# Altium PCB SPI-主板-开关.PcbDoc (part 11 of 11)
Units mm, origin at the board's own origin, x right, y up, seen from the top; angles counter-clockwise.
Board outline 97.69 x 103.45 mm, 2 copper layers (Top Layer, Bottom Layer); 86 components, 63 nets, 260 pads, 250 vias.
Unrouted connection lines stored in the file: 6.
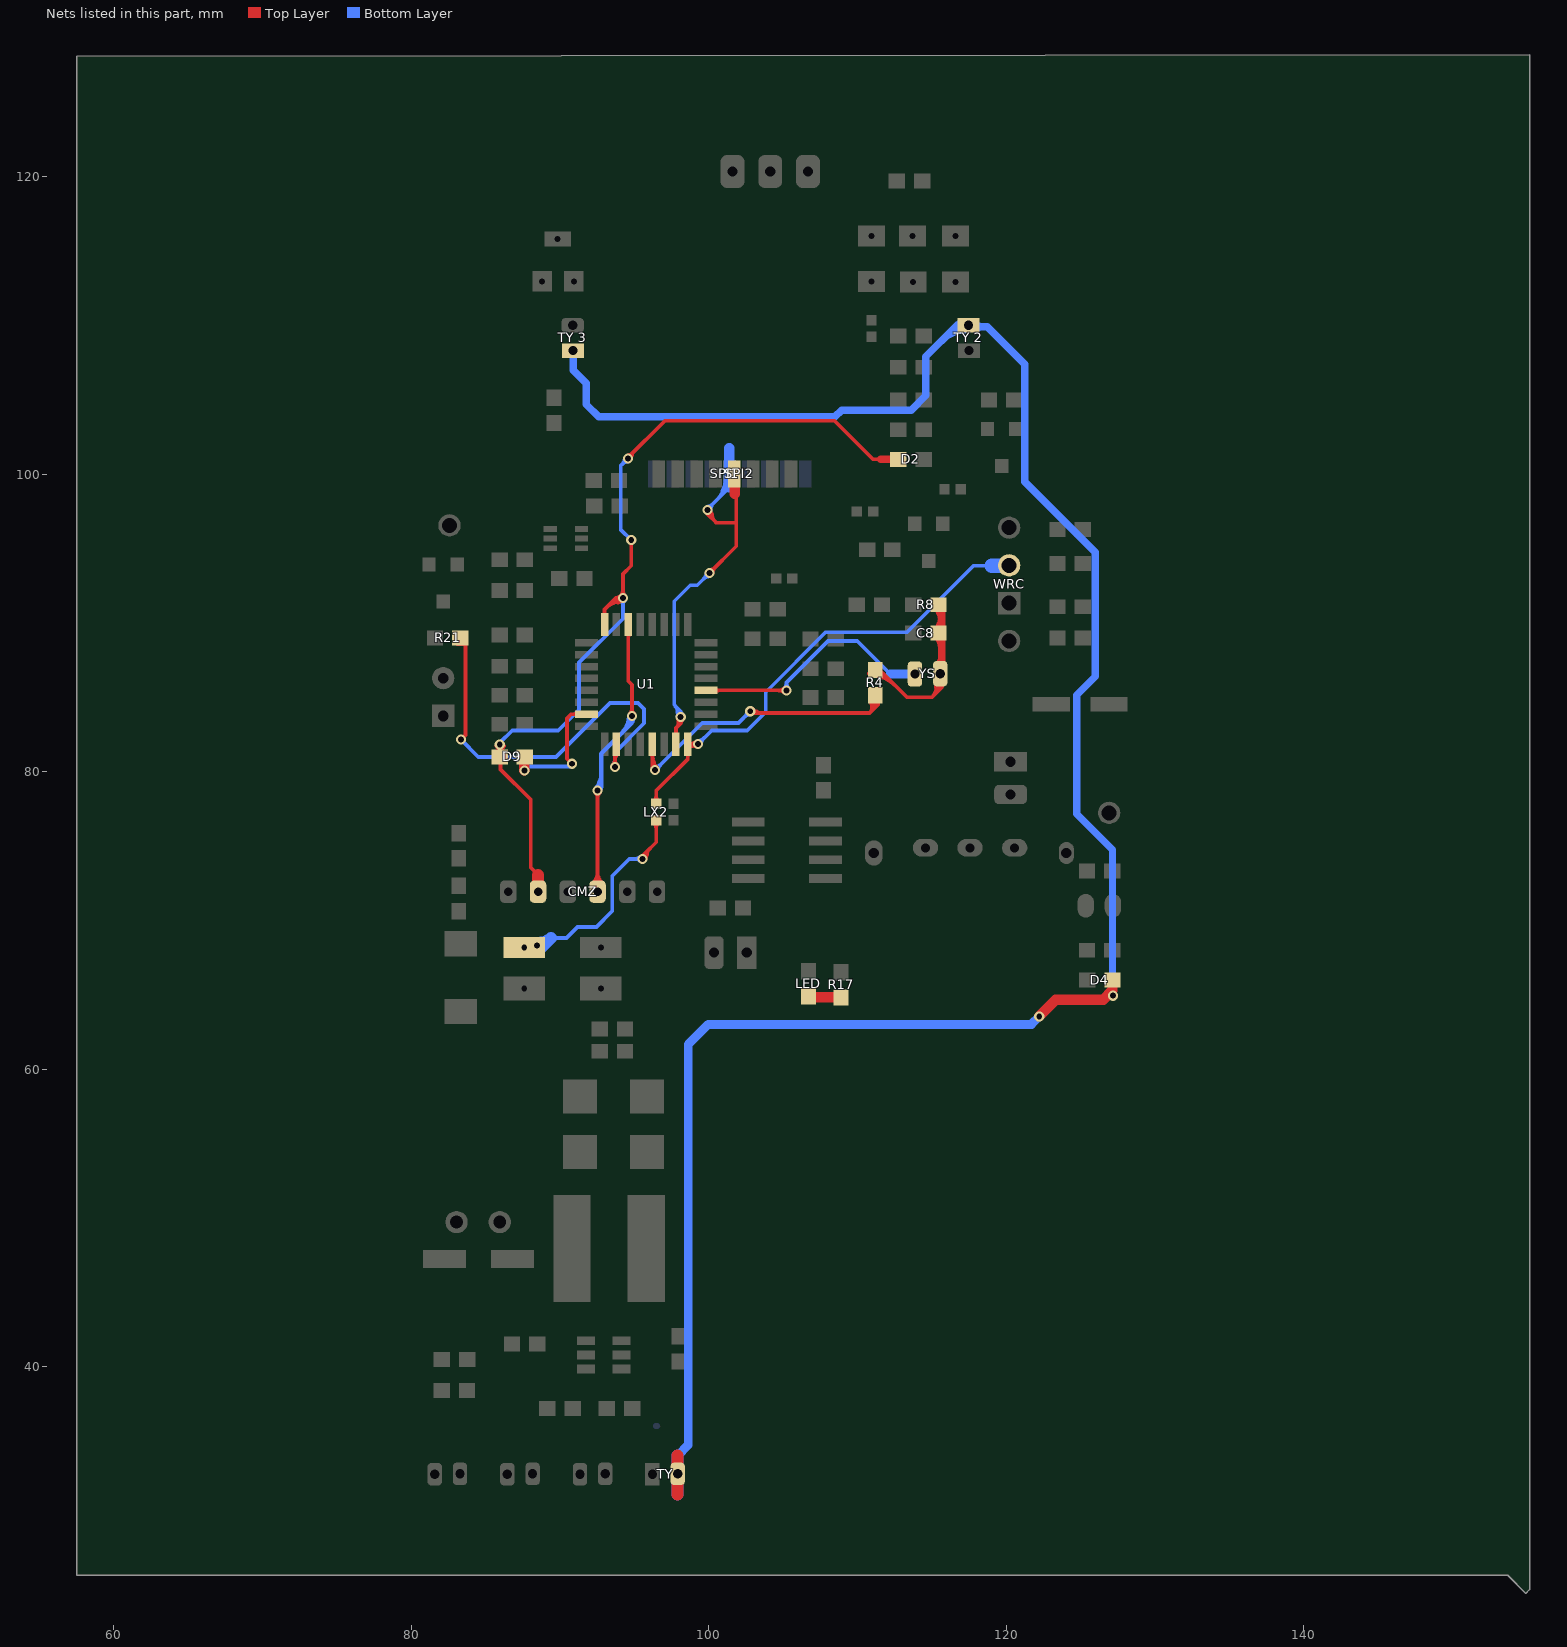
[diagram p11: the nets of this part, all layers, seen from the top]

## Via types
v1: diameter 0.9, hole 0.5, Top Layer to Bottom Layer, 104 vias
v2: diameter 0.68, hole 0.4, Top Layer to Bottom Layer, 100 vias
v3: diameter 1.1, hole 0.6, Top Layer to Bottom Layer, tented both sides, 16 vias
v4: diameter 1, hole 0.8, Top Layer to Bottom Layer, tented both sides, 8 vias
v5: diameter 1, hole 0.6, Top Layer to Bottom Layer, 4 vias
v6: diameter 0.8, hole 0.5, Top Layer to Bottom Layer, 4 vias
v7: diameter 0.7, hole 0.4, Top Layer to Bottom Layer, 4 vias
v8: diameter 0.6, hole 0.4, Top Layer to Bottom Layer, 3 vias
v9: diameter 1.1, hole 0.68, Top Layer to Bottom Layer, 2 vias
v10: diameter 0.8, hole 0.4, Top Layer to Bottom Layer, 2 vias
v11: diameter 1, hole 0.5, Top Layer to Bottom Layer, 1 vias
v12: diameter 0.9, hole 0.6, Top Layer to Bottom Layer, tented bottom, 1 vias
v13: diameter 1.2, hole 0.68, Top Layer to Bottom Layer, 1 vias

## Nets (pads, with @x,y where several pads share a name; then routed paths per layer and width w, separated by ;. In a path a pad name is that pad's centre, name@x,y a point inside that pad or via, vN(x,y) a via of type N, cw(c..) or ccw(c..) an arc to the next point about the centre after c; other vN are vias at no path point) (continued)
SCK: SPI1.4 SPI2.4 U1.31 | length 76.4
  Top Layer w0.254: U1.31@97.8,81.853 97.8,82.939 ; v2(98.12,83.693) 98.12,83.259 ; v2(99.924,97.612) 99.924,97.333 100.508,96.749 101.854,96.749 ; v2@100.025,93.523 100.051,93.497 v2(100.051,93.358) 101.854,95.161 SPI1.4@101.854,100.406 ; 100.101,97.155 v2@100.101,97.434 ; SPI1.4@101.727,100.032 SPI1.4@101.727,100.406 ; U1.31@97.713,82.464 ccw(c97.503,82.674) 97.8,82.674 ; U1.31@97.713,82.464 ccw(c97.503,82.674) 97.8,82.674 ; U1.31@97.713,82.464 ccw(c97.503,82.674) 97.8,82.674 ; 97.8,82.674 ccw(c98.097,82.674) U1.31@97.887,82.464 ; 97.8,82.674 ccw(c98.097,82.674) U1.31@97.887,82.464 ; 97.8,82.674 ccw(c98.097,82.674) U1.31@97.887,82.464 ; 97.8,82.939 ccw(c97.375,83.365) v2@97.925,83.607 ; 97.8,82.939 ccw(c97.375,83.365) v2@97.925,83.607 ; 97.8,82.939 ccw(c97.375,83.365) v2@97.925,83.607 ; 97.8,82.939 98.12,83.259 ; v2@97.99,83.524 cw(c97.785,83.259) 98.12,83.259 ; v2@97.99,83.524 cw(c97.785,83.259) 98.12,83.259 ; v2@97.99,83.524 cw(c97.785,83.259) 98.12,83.259 ; 98.063,83.202 ccw(c97.739,83.525) v2@98.158,83.71 ; 98.063,83.202 ccw(c97.739,83.525) v2@98.158,83.71 ; 98.063,83.202 ccw(c97.739,83.525) v2@98.158,83.71 ; 98.12,83.259 cw(c98.455,83.259) v2@98.25,83.524 ; 98.12,83.259 cw(c98.455,83.259) v2@98.25,83.524 ; 98.12,83.259 cw(c98.455,83.259) v2@98.25,83.524 ; v2@99.876,97.405 cw(c99.811,97.122) 100.101,97.122 ; v2@99.876,97.405 cw(c99.811,97.122) 100.101,97.122 ; v2@99.876,97.405 cw(c99.811,97.122) 100.101,97.122 ; v2@99.883,97.612 ccw(c100.458,97.612) 100.051,97.205 ; v2@99.883,97.612 ccw(c100.458,97.612) 100.051,97.205 ; v2@99.883,97.612 ccw(c100.458,97.612) 100.051,97.205 ; v2@99.944,97.648 cw(c99.642,97.125) 100.225,97.281 ; v2@99.944,97.648 cw(c99.642,97.125) 100.225,97.281 ; v2@99.944,97.648 cw(c99.642,97.125) 100.225,97.281 ; v2@100.051,93.571 ccw(c100.051,94.085) 100.414,93.721 ; v2@100.051,93.571 ccw(c100.051,94.085) 100.414,93.721 ; v2@100.051,93.571 ccw(c100.051,94.085) 100.414,93.721 ; v2@100.137,97.612 ccw(c101.325,97.612) 100.485,96.772 ; v2@100.137,97.612 ccw(c101.325,97.612) 100.485,96.772 ; v2@100.137,97.612 ccw(c101.325,97.612) 100.485,96.772 ; v2@100.264,93.358 cw(c100.778,93.358) 100.414,93.721 ; v2@100.264,93.358 cw(c100.778,93.358) 100.414,93.721 ; v2@100.264,93.358 cw(c100.778,93.358) 100.414,93.721 ; SPI1.4@101.516,99.346 cw(c100.701,98.531) 101.854,98.531 ; SPI1.4@101.516,99.346 cw(c100.701,98.531) 101.854,98.531 ; SPI1.4@101.516,99.346 cw(c100.701,98.531) 101.854,98.531 ; SPI1.4@101.696,99.526 cw(c101.314,99.144) SPI1.4@101.854,99.144 ; SPI1.4@101.696,99.526 cw(c101.314,99.144) SPI1.4@101.854,99.144 ; SPI1.4@101.696,99.526 cw(c101.314,99.144) SPI1.4@101.854,99.144 ; SPI1.4@101.854,99.144 cw(c102.14,99.144) SPI1.4@101.938,99.346 ; SPI1.4@101.854,99.144 cw(c102.14,99.144) SPI1.4@101.938,99.346 ; SPI1.4@101.854,99.144 cw(c102.14,99.144) SPI1.4@101.938,99.346
  Top Layer w0.7: SPI1.4@101.727,100.406 SPI1.4@101.759,99.955 ; 101.752,98.679 SPI1.4@101.752,100.21
  Bottom Layer w0.254: v2(98.12,83.693) 98.12,84.074 ; v2@99.898,97.638 SPI2.4@101.397,99.136 ; v2@100.051,93.497 v2(100.051,93.358) 99.231,92.539 98.762,92.539 97.688,91.465 97.688,84.506 ; SPI2.4@101.124,99.473 cw(c100.78,99.373) 101.033,99.12 cw(c101.371,98.783) SPI2.4@101.395,99.259 ; 97.688,84.506 cw(c97.101,83.918) v2@97.912,83.739 ; 97.688,84.506 cw(c97.101,83.918) v2@97.912,83.739 ; 97.688,84.506 cw(c97.101,83.918) v2@97.912,83.739 ; 97.688,84.506 98.12,84.074 ; 97.897,84.081 ccw(c98.5,84.108) v2@98.093,83.663 ; 97.897,84.081 ccw(c98.5,84.108) v2@98.093,83.663 ; 97.897,84.081 ccw(c98.5,84.108) v2@98.093,83.663 ; v2@98.009,83.874 ccw(c97.886,84.074) 98.12,84.074 ; v2@98.009,83.874 ccw(c97.886,84.074) 98.12,84.074 ; v2@98.009,83.874 ccw(c97.886,84.074) 98.12,84.074 ; 98.016,84.178 cw(c97.638,83.8) v2@98.16,83.684 ; 98.016,84.178 cw(c97.638,83.8) v2@98.16,83.684 ; 98.016,84.178 cw(c97.638,83.8) v2@98.16,83.684 ; 98.12,84.074 ccw(c98.354,84.074) v2@98.232,83.874 ; 98.12,84.074 ccw(c98.354,84.074) v2@98.232,83.874 ; 98.12,84.074 ccw(c98.354,84.074) v2@98.232,83.874 ; 99.687,92.994 ccw(c99.323,93.358) v2@99.838,93.358 ; 99.687,92.994 cw(c100.051,92.63) v2@100.051,93.145 ; 99.687,92.994 ccw(c99.323,93.358) v2@99.838,93.358 ; 99.687,92.994 cw(c100.051,92.63) v2@100.051,93.145 ; 99.687,92.994 ccw(c99.323,93.358) v2@99.838,93.358 ; 99.687,92.994 cw(c100.051,92.63) v2@100.051,93.145 ; v2@99.924,97.825 ccw(c99.924,98.217) 100.2,97.94 ; v2@99.924,97.825 ccw(c99.924,98.217) 100.2,97.94 ; v2@99.924,97.825 ccw(c99.924,98.217) 100.2,97.94 ; v2@100.137,97.612 cw(c100.773,97.612) 100.323,98.063 ; v2@100.137,97.612 cw(c100.773,97.612) 100.323,98.063 ; v2@100.137,97.612 cw(c100.773,97.612) 100.323,98.063 ; 100.613,98.353 ccw(c99.409,99.557) SPI2.4@101.112,99.557 ; 100.613,98.353 ccw(c99.409,99.557) SPI2.4@101.112,99.557 ; 100.613,98.353 ccw(c99.409,99.557) SPI2.4@101.112,99.557 ; 100.925,98.857 cw(c101.976,98.576) SPI2.4@101.432,99.519 ; 100.925,98.857 cw(c101.976,98.576) SPI2.4@101.432,99.519 ; 100.925,98.857 cw(c101.976,98.576) SPI2.4@101.432,99.519 ; 101.047,98.786 ccw(c100.276,99.557) SPI2.4@101.366,99.557 ; 101.047,98.786 ccw(c100.276,99.557) SPI2.4@101.366,99.557 ; 101.047,98.786 ccw(c100.276,99.557) SPI2.4@101.366,99.557 ; SPI2.4@101.152,99.408 cw(c100.655,99.121) 101.209,98.972 ; SPI2.4@101.152,99.408 cw(c100.655,99.121) 101.209,98.972 ; SPI2.4@101.152,99.408 cw(c100.655,99.121) 101.209,98.972 ; 101.201,98.941 cw(c101.675,98.814) SPI2.4@101.51,99.276 ; 101.201,98.941 cw(c101.675,98.814) SPI2.4@101.51,99.276 ; 101.201,98.941 cw(c101.675,98.814) SPI2.4@101.51,99.276
  Bottom Layer w0.7: SPI2.4@101.397,99.136 101.397,101.752
SWIM: LX2.1 LX2.2 pad.0@87.6,68.182 U1.32 WRC.3 | length 80.9
  Top Layer w0.254: v2(95.555,74.143) 95.555,74.346 96.469,75.26 LX2.1@96.469,76.742 ; LX2.2@96.469,77.842 96.469,78.74 98.6,80.871 U1.32@98.6,81.852 ; v2(99.289,81.864) 98.857,81.864 ; v2@95.573,74.106 ccw(c95.335,74.581) 95.848,74.443 ; v2@95.573,74.106 ccw(c95.335,74.581) 95.848,74.443 ; v2@95.573,74.106 ccw(c95.335,74.581) 95.848,74.443 ; v2@95.768,74.143 cw(c96.773,74.143) 96.062,74.853 ; v2@95.768,74.143 cw(c96.773,74.143) 96.062,74.853 ; v2@95.768,74.143 cw(c96.773,74.143) 96.062,74.853 ; LX2.1@96.312,76.584 cw(c95.931,76.204) 96.469,76.204 ; LX2.1@96.312,76.584 cw(c95.931,76.204) 96.469,76.204 ; LX2.1@96.312,76.584 cw(c95.931,76.204) 96.469,76.204 ; LX2.2@96.312,78 ccw(c95.931,78.38) 96.469,78.38 ; LX2.2@96.312,78 ccw(c95.931,78.38) 96.469,78.38 ; LX2.2@96.312,78 ccw(c95.931,78.38) 96.469,78.38 ; 96.469,76.204 cw(c97.008,76.204) LX2.1@96.627,76.584 ; 96.469,76.204 cw(c97.008,76.204) LX2.1@96.627,76.584 ; 96.469,76.204 cw(c97.008,76.204) LX2.1@96.627,76.584 ; 96.469,78.38 ccw(c97.008,78.38) LX2.2@96.627,78 ; 96.469,78.38 ccw(c97.008,78.38) LX2.2@96.627,78 ; 96.469,78.38 ccw(c97.008,78.38) LX2.2@96.627,78 ; U1.32@98.513,81.24 cw(c98.303,81.031) 98.6,81.031 ; U1.32@98.513,81.24 cw(c98.303,81.031) 98.6,81.031 ; U1.32@98.513,81.24 cw(c98.303,81.031) 98.6,81.031 ; 98.6,81.031 cw(c98.897,81.031) U1.32@98.687,81.24 ; 98.6,81.031 cw(c98.897,81.031) U1.32@98.687,81.24 ; 98.6,81.031 cw(c98.897,81.031) U1.32@98.687,81.24 ; U1.32@98.6,81.607 cw(c98.937,81.27) v2@99.18,81.681 ; U1.32@98.6,81.607 cw(c98.937,81.27) v2@99.18,81.681 ; U1.32@98.6,81.607 cw(c98.937,81.27) v2@99.18,81.681 ; U1.32@98.6,81.607 98.857,81.864 ; U1.32@98.687,81.765 cw(c98.925,81.527) 98.925,81.864 ; U1.32@98.687,81.765 cw(c98.925,81.527) 98.925,81.864 ; U1.32@98.687,81.765 cw(c98.925,81.527) 98.925,81.864 ; U1.32@98.687,81.939 ccw(c98.869,82.121) 98.869,81.864 ; U1.32@98.687,81.939 ccw(c98.869,82.121) 98.869,81.864 ; U1.32@98.687,81.939 ccw(c98.869,82.121) 98.869,81.864 ; U1.32@98.688,81.939 ccw(c98.838,82.087) 98.944,81.904 ; U1.32@98.688,81.939 ccw(c98.838,82.087) 98.944,81.904 ; U1.32@98.688,81.939 ccw(c98.838,82.087) 98.944,81.904 ; U1.32@98.69,81.937 ccw(c98.857,82.093) 98.857,81.864 ; U1.32@98.69,81.937 ccw(c98.857,82.093) 98.857,81.864 ; U1.32@98.69,81.937 ccw(c98.857,82.093) 98.857,81.864 ; U1.32@98.701,81.783 cw(c98.857,81.675) 98.857,81.864 ; U1.32@98.701,81.783 cw(c98.857,81.675) 98.857,81.864 ; U1.32@98.701,81.783 cw(c98.857,81.675) 98.857,81.864 ; U1.32@98.832,81.839 cw(c99.11,81.561) v2@99.309,81.899 ; U1.32@98.832,81.839 cw(c99.11,81.561) v2@99.309,81.899 ; U1.32@98.832,81.839 cw(c99.11,81.561) v2@99.309,81.899 ; 98.857,81.864 ccw(c98.857,82.195) v2@99.12,81.994 ; 98.857,81.864 cw(c98.857,81.533) v2@99.12,81.735 ; 98.857,81.864 ccw(c98.857,82.195) v2@99.12,81.994 ; 98.857,81.864 cw(c98.857,81.533) v2@99.12,81.735 ; 98.857,81.864 ccw(c98.857,82.195) v2@99.12,81.994 ; 98.857,81.864 cw(c98.857,81.533) v2@99.12,81.735
  Bottom Layer w0.254: 89.408,68.834 90.449,68.834 91.186,69.571 92.456,69.571 93.523,70.637 93.523,73 94.666,74.143 v2@95.549,74.143 ; v2(99.289,81.864) 100.203,82.779 102.591,82.779 103.835,84.023 103.835,85.355 107.863,89.383 113.335,89.383 117.805,93.853 119.05,93.853 ; 95.041,74.143 ccw(c95.041,74.657) 95.404,74.293 cw(c95.041,74.657) 95.041,74.143 ; 95.041,74.143 cw(c95.041,73.628) 95.404,73.992 ccw(c95.041,73.628) 95.041,74.143 ; 99.652,82.228 ccw(c100.016,81.864) 99.502,81.864 cw(c100.016,81.864) 99.652,82.228 ; 99.652,82.228 cw(c99.289,82.591) 99.289,82.077 ccw(c99.289,82.591) 99.652,82.228
  Bottom Layer w0.8: pad.0@87.6,68.182 pad.0@87.968,68.182 ; pad.0@87.968,68.182 cw(c88.341,67.81) v10(88.443,68.326) ; pad.0@87.968,68.182 cw(c88.341,67.81) v10(88.443,68.326) ; pad.0@87.968,68.182 cw(c88.341,67.81) v10(88.443,68.326) ; pad.0@87.968,68.182 pad.0@87.986,68.199 ; pad.0@87.986,68.199 cw(c88.327,67.858) v10(88.443,68.326) ; pad.0@87.986,68.199 cw(c88.327,67.858) v10(88.443,68.326) ; pad.0@87.986,68.199 cw(c88.327,67.858) v10(88.443,68.326) ; pad.0@87.986,68.199 88.773,68.199 89.408,68.834 ; pad.0@88.342,68.479 ccw(c88.52,69.722) 89.408,68.834 ; pad.0@88.342,68.479 ccw(c88.52,69.722) 89.408,68.834 ; pad.0@88.342,68.479 ccw(c88.52,69.722) 89.408,68.834 ; v10(88.443,68.326) ccw(c88.443,69.43) 89.223,68.649 ; v10(88.443,68.326) cw(c88.882,67.981) pad.0@88.816,68.536 ; v10(88.443,68.326) ccw(c88.443,69.43) 89.223,68.649 ; v10(88.443,68.326) cw(c88.882,67.981) pad.0@88.816,68.536 ; v10(88.443,68.326) cw(c88.882,67.981) pad.0@88.816,68.536 ; v10(88.443,68.326) ccw(c88.443,69.43) 89.223,68.649 ; v10(88.443,68.326) cw(c88.882,67.981) pad.0@88.816,68.536 ; v10(88.443,68.326) cw(c88.882,67.981) pad.0@88.816,68.536 ; v10(88.443,68.326) cw(c88.882,67.981) pad.0@88.816,68.536
  Bottom Layer w1: 119.05,93.853 WRC.3@120.2,93.853
T-LED: LED.2 R17.1 | length 2.3
  Top Layer w0.7: LED.2@106.6,64.831 107.544,64.831 R17.1@108.9,64.831
TEMP: R21.1 U1.26 | length 35.3
  Top Layer w0.254: R21.1@83.095,88.595 83.642,88.595 83.642,82.474 v2(83.337,82.169) ; v2(93.701,80.315) U1.26@93.701,82.223 ; v2@93.55,80.465 ccw(c93.186,80.829) 93.701,80.829 ; v2@93.55,80.465 ccw(c93.186,80.829) 93.701,80.829 ; v2@93.55,80.465 ccw(c93.186,80.829) 93.701,80.829 ; 93.701,80.79 cw(c94.337,80.79) U1.26@93.887,81.241 ; 93.701,80.79 cw(c94.337,80.79) U1.26@93.887,81.241 ; 93.701,80.79 cw(c94.337,80.79) U1.26@93.887,81.241 ; 93.701,80.829 ccw(c94.215,80.829) v2@93.851,80.465 ; 93.701,80.829 ccw(c94.215,80.829) v2@93.851,80.465 ; 93.701,80.829 ccw(c94.215,80.829) v2@93.851,80.465 ; U1.26@93.72,81.235 cw(c93.605,81.102) 93.757,81.015 ; U1.26@93.72,81.235 cw(c93.605,81.102) 93.757,81.015 ; U1.26@93.72,81.235 cw(c93.605,81.102) 93.757,81.015
  Bottom Layer w0.254: v2(83.337,82.169) 84.506,81.001 89.738,81.001 93.37,84.633 95.25,84.633 95.656,84.226 95.656,83.261 93.701,81.305 v2(93.701,80.315) ; v2@93.55,80.465 ccw(c93.186,80.829) 93.701,80.829 ; v2@93.55,80.465 ccw(c93.186,80.829) 93.701,80.829 ; v2@93.55,80.465 ccw(c93.186,80.829) 93.701,80.829 ; 93.701,80.829 ccw(c94.215,80.829) v2@93.851,80.465 ; 93.701,80.829 ccw(c94.215,80.829) v2@93.851,80.465 ; 93.701,80.829 ccw(c94.215,80.829) v2@93.851,80.465
TY: "TY 2.1" "TY 3.1" D4.2 TY.1 | length 161.8
  Top Layer w0.7: v2(122.225,63.551) 123.342,64.668 126.517,64.668 127.15,65.301 D4.2@127.15,66
  Top Layer w0.8: 97.917,31.394 97.917,34.026
  Bottom Layer w0.5: 90.881,108.419 90.881,107.01 91.77,106.121 91.77,104.699 92.608,103.861 108.483,103.861 108.941,104.318 113.619,104.318 114.605,105.304 114.605,107.925 116.599,109.919 ; 116.158,109.422 ccw(c115.818,110.691) 116.956,110.034 ; v2(127.178,64.948) 127.152,64.973 127.152,74.752 124.739,77.165 124.739,85.166 125.984,86.411 125.984,94.767 121.26,99.492 121.26,107.391 118.732,109.919 117.475,109.919 116.599,109.919 ; 90.719,108.257 cw(c90.326,107.864) 90.881,107.864 ; 90.719,108.257 cw(c90.326,107.864) 90.881,107.864 ; 90.719,108.257 cw(c90.326,107.864) 90.881,107.864 ; 90.881,107.864 cw(c91.436,107.864) 91.044,108.257 ; 90.881,107.864 cw(c91.436,107.864) 91.044,108.257 ; 90.881,107.864 cw(c91.436,107.864) 91.044,108.257 ; 116.6,109.919 ccw(c116.6,110.474) 116.992,110.082 ; 116.6,109.919 cw(c116.6,109.364) 116.992,109.757 ; 116.6,109.919 ccw(c116.6,110.474) 116.992,110.082 ; 116.6,109.919 cw(c116.6,109.364) 116.992,109.757 ; 116.6,109.919 ccw(c116.6,110.474) 116.992,110.082 ; 116.6,109.919 cw(c116.6,109.364) 116.992,109.757 ; 117.958,109.757 cw(c118.35,109.364) 118.35,109.919 ; 117.958,109.757 cw(c118.35,109.364) 118.35,109.919 ; 117.958,109.757 cw(c118.35,109.364) 118.35,109.919 ; 117.958,110.082 ccw(c118.35,110.474) 118.35,109.919 ; 117.958,110.082 ccw(c118.35,110.474) 118.35,109.919 ; 117.958,110.082 ccw(c118.35,110.474) 118.35,109.919 ; 115.814,109.134 cw(c117.155,107.793) 117.155,109.689 ccw(c117.155,107.793) 115.814,109.134 ; 116.667,109.987 cw(c117.155,109.5) 117.155,110.189 ccw(c117.155,109.5) 116.667,109.987
  Bottom Layer w0.6: 97.916,34.032 98.628,34.744 98.628,61.671 99.974,63.017 121.691,63.017 v2(122.225,63.551)
  Bottom Layer w0.8: 97.917,31.42 97.917,34.052
Y30: CMZ.6 D2.2 D9.1 U1.16 | length 90.8
  Top Layer w0.254: D9.1@85.952,81.379 ccw(c85.061,81.069) v2@85.728,81.736 ; D9.1@85.976,81.298 ccw(c85.061,81.069) v2@85.728,81.736 ; D9.1@85.978,81.291 ccw(c85.061,81.069) v2@85.728,81.736 ; v2@86.004,82 86.004,80.162 88.036,78.13 88.036,73.558 88.53,73.065 ; U1.16@93,89.902 93,90.917 93.777,91.694 ; 93.604,91.355 cw(c93.998,90.962) v2@94.169,91.491 ; v2@94.539,101.092 97.053,103.607 108.458,103.607 111.049,101.016 111.531,101.016 ; v2(94.793,95.58) 94.793,93.853 94.234,93.294 v2(94.234,91.694) 93.777,91.694 ; D9.1@86.022,81.302 cw(c86.862,81.13) v2@86.256,81.736 ; D9.1@86.022,81.302 cw(c86.862,81.13) v2@86.256,81.736 ; D9.1@86.022,81.302 cw(c86.862,81.13) v2@86.256,81.736 ; U1.16@92.913,90.514 ccw(c92.703,90.724) 93,90.724 ; U1.16@92.913,90.514 ccw(c92.703,90.724) 93,90.724 ; U1.16@92.913,90.514 ccw(c92.703,90.724) 93,90.724 ; 93,90.724 ccw(c93.297,90.724) U1.16@93.087,90.514 ; 93,90.724 ccw(c93.297,90.724) U1.16@93.087,90.514 ; 93,90.724 ccw(c93.297,90.724) U1.16@93.087,90.514 ; 93.09,91.007 cw(c94.234,89.863) v2@94.234,91.481 ; 93.09,91.007 cw(c94.234,89.863) v2@94.234,91.481 ; 93.09,91.007 cw(c94.234,89.863) v2@94.234,91.481 ; 93.311,91.234 ccw(c92.996,92.409) v2@94.05,91.801 ; 93.311,91.234 ccw(c92.996,92.409) v2@94.05,91.801 ; 93.311,91.234 ccw(c92.996,92.409) v2@94.05,91.801 ; 93.524,91.441 cw(c94.234,90.73) v2@94.234,91.735 ; 93.524,91.441 cw(c94.234,90.73) v2@94.234,91.735 ; 93.524,91.441 cw(c94.234,90.73) v2@94.234,91.735 ; 93.777,91.694 ccw(c93.777,92.078) v2@94.071,91.831 ; 93.777,91.694 cw(c93.777,91.31) v2@94.071,91.557 ; 93.777,91.694 ccw(c93.777,92.078) v2@94.071,91.831 ; 93.777,91.694 cw(c93.777,91.31) v2@94.071,91.557 ; 93.777,91.694 ccw(c93.777,92.078) v2@94.071,91.831 ; 93.777,91.694 cw(c93.777,91.31) v2@94.071,91.557 ; 93.798,91.618 cw(c93.875,91.33) v2@94.084,91.542 ; 93.798,91.618 cw(c93.875,91.33) v2@94.084,91.542 ; 93.798,91.618 cw(c93.875,91.33) v2@94.084,91.542 ; 93.819,91.624 ccw(c93.721,91.99) v2@94.05,91.8 ; 93.819,91.624 ccw(c93.721,91.99) v2@94.05,91.8 ; 93.819,91.624 ccw(c93.721,91.99) v2@94.05,91.8 ; 93.903,91.392 ccw(c93.747,91.975) v2@94.27,91.674 ; 93.903,91.392 ccw(c93.747,91.975) v2@94.27,91.674 ; 93.903,91.392 ccw(c93.747,91.975) v2@94.27,91.674 ; v2@94.083,91.845 ccw(c93.72,92.208) 94.234,92.208 ; v2@94.083,91.845 ccw(c93.72,92.208) 94.234,92.208 ; v2@94.083,91.845 ccw(c93.72,92.208) 94.234,92.208 ; 94.234,92.208 ccw(c94.748,92.208) v2@94.385,91.845 ; 94.234,92.208 ccw(c94.748,92.208) v2@94.385,91.845 ; 94.234,92.208 ccw(c94.748,92.208) v2@94.385,91.845 ; v2@94.564,101.28 ccw(c94.564,101.671) 94.841,101.394 ; v2@94.564,101.28 ccw(c94.564,101.671) 94.841,101.394 ; v2@94.564,101.28 ccw(c94.564,101.671) 94.841,101.394 ; v2@94.576,101.027 ccw(c94.47,101.394) 94.838,101.295 ; v2@94.576,101.027 ccw(c94.47,101.394) 94.838,101.295 ; v2@94.576,101.027 ccw(c94.47,101.394) 94.838,101.295 ; v2@94.777,101.067 cw(c95.414,101.067) 94.964,101.517 ; v2@94.777,101.067 cw(c95.414,101.067) 94.964,101.517 ; v2@94.777,101.067 cw(c95.414,101.067) 94.964,101.517
  Top Layer w0.5: 111.582,101.016 D2.2@112.979,101.016 ; 112.058,101.016 cw(c112.058,100.358) D2.2@112.523,100.823 ; 112.058,101.016 cw(c112.058,100.358) D2.2@112.523,100.823 ; 112.058,101.016 cw(c112.058,100.358) D2.2@112.523,100.823 ; 112.135,101.016 ccw(c112.135,101.565) D2.2@112.523,101.177 ; 112.135,101.016 ccw(c112.135,101.565) D2.2@112.523,101.177 ; 112.135,101.016 ccw(c112.135,101.565) D2.2@112.523,101.177
  Top Layer w0.8: CMZ.6@88.53,71.944 88.53,73.065
  Bottom Layer w0.254: v2@85.979,81.966 86.792,82.779 89.891,82.779 91.288,84.176 91.288,87.351 94.234,90.297 v2@94.234,91.897 ; v2(94.564,101.067) 94.082,100.584 94.082,96.291 v2(94.793,95.58) ; 94.201,100.703 ccw(c93.837,101.067) 94.351,101.067 cw(c93.837,101.067) 94.201,100.703 ; 94.201,100.703 cw(c94.564,100.339) 94.564,100.854 ccw(c94.564,100.339) 94.201,100.703 ; 94.234,91.18 ccw(c93.72,91.18) 94.083,91.543 cw(c93.72,91.18) 94.234,91.18 ; 94.234,91.18 cw(c94.748,91.18) 94.385,91.543 ccw(c94.748,91.18) 94.234,91.18
  other v2: 85.954,81.839
Y30-D: D9.2 U1.23 | length 10.4
  Top Layer w0.254: v2(90.805,80.543) 90.475,80.874 90.475,83.591 90.761,83.878 U1.23@91.775,83.878 ; 90.953,83.878 ccw(c90.953,84.174) U1.23@91.163,83.964 ; 90.953,83.878 cw(c90.953,83.581) U1.23@91.163,83.791 ; 90.953,83.878 ccw(c90.953,84.174) U1.23@91.163,83.964 ; 90.953,83.878 cw(c90.953,83.581) U1.23@91.163,83.791 ; 90.953,83.878 ccw(c90.953,84.174) U1.23@91.163,83.964 ; 90.953,83.878 cw(c90.953,83.581) U1.23@91.163,83.791
  Top Layer w0.7: v2(87.605,80.086) D9.2@87.605,81.111
  Bottom Layer w0.254: v2(87.605,80.086) 87.884,80.366 90.678,80.366 v2@90.83,80.518
Y>: CMZ.4 U1.14 | length 47.8
  Top Layer w0.254: CMZ.4@92.53,71.944 v2(92.53,78.74) ; U1.14@94.6,89.902 94.6,86.096 94.844,85.852 v2@94.844,83.769 ; CMZ.4@92.196,72.478 ccw(c91.388,73.286) 92.53,73.286 ; CMZ.4@92.196,72.478 ccw(c91.388,73.286) 92.53,73.286 ; CMZ.4@92.196,72.478 ccw(c91.388,73.286) 92.53,73.286 ; v2@92.379,78.589 cw(c92.016,78.226) 92.53,78.226 ; v2@92.379,78.589 cw(c92.016,78.226) 92.53,78.226 ; v2@92.379,78.589 cw(c92.016,78.226) 92.53,78.226 ; 92.53,73.286 ccw(c93.672,73.286) CMZ.4@92.864,72.478 ; 92.53,73.286 ccw(c93.672,73.286) CMZ.4@92.864,72.478 ; 92.53,73.286 ccw(c93.672,73.286) CMZ.4@92.864,72.478 ; 92.53,78.226 cw(c93.044,78.226) v2@92.681,78.589 ; 92.53,78.226 cw(c93.044,78.226) v2@92.681,78.589 ; 92.53,78.226 cw(c93.044,78.226) v2@92.681,78.589 ; U1.14@94.513,89.29 cw(c94.303,89.08) 94.6,89.08 ; U1.14@94.513,89.29 cw(c94.303,89.08) 94.6,89.08 ; U1.14@94.513,89.29 cw(c94.303,89.08) 94.6,89.08 ; 94.6,89.08 cw(c94.897,89.08) U1.14@94.687,89.29 ; 94.6,89.08 cw(c94.897,89.08) U1.14@94.687,89.29 ; 94.6,89.08 cw(c94.897,89.08) U1.14@94.687,89.29 ; v2@94.693,83.894 ccw(c94.329,84.258) 94.844,84.258 ; v2@94.693,83.894 ccw(c94.329,84.258) 94.844,84.258 ; v2@94.693,83.894 ccw(c94.329,84.258) 94.844,84.258 ; 94.844,84.258 ccw(c95.358,84.258) v2@94.994,83.894 ; 94.844,84.258 ccw(c95.358,84.258) v2@94.994,83.894 ; 94.844,84.258 ccw(c95.358,84.258) v2@94.994,83.894
  Bottom Layer w0.3: v2(92.53,78.74) 92.786,78.996 92.786,81.229 94.844,83.287 ; 94.541,83.182 ccw(c94.19,83.533) v2@94.663,83.685 ; v2@94.844,83.769 94.844,83.287 ; v2@92.396,78.874 ccw(c91.453,79.817) 92.786,79.817 ; v2@92.396,78.874 ccw(c91.453,79.817) 92.786,79.817 ; v2@92.396,78.874 ccw(c91.453,79.817) 92.786,79.817 ; v2@92.608,78.662 ccw(c92.177,79.093) 92.786,79.093 ; v2@92.608,78.662 ccw(c92.177,79.093) 92.786,79.093 ; v2@92.608,78.662 ccw(c92.177,79.093) 92.786,79.093 ; 92.688,79.38 ccw(c93.15,79.113) v2@92.693,78.838 ; 92.688,79.38 ccw(c93.15,79.113) v2@92.693,78.838 ; 92.688,79.38 ccw(c93.15,79.113) v2@92.693,78.838 ; 94.196,82.639 ccw(c93.091,83.744) v2@94.654,83.744 ; 94.196,82.639 ccw(c93.091,83.744) v2@94.654,83.744 ; 94.196,82.639 ccw(c93.091,83.744) v2@94.654,83.744 ; 94.433,82.92 cw(c95.481,82.639) v2@94.939,83.579 ; 94.433,82.92 cw(c95.481,82.639) v2@94.939,83.579 ; 94.433,82.92 cw(c95.481,82.639) v2@94.939,83.579 ; 94.708,83.151 ccw(c94.115,83.744) v2@94.954,83.744 ; 94.708,83.151 ccw(c94.115,83.744) v2@94.954,83.744 ; 94.708,83.151 ccw(c94.115,83.744) v2@94.954,83.744 ; v2@94.71,83.609 cw(c94.389,83.287) 94.844,83.287 ; v2@94.71,83.609 cw(c94.389,83.287) 94.844,83.287 ; v2@94.71,83.609 cw(c94.389,83.287) 94.844,83.287 ; 94.844,83.287 cw(c95.299,83.287) v2@94.978,83.609 ; 94.844,83.287 cw(c95.299,83.287) v2@94.978,83.609 ; 94.844,83.287 cw(c95.299,83.287) v2@94.978,83.609
  other v2: 94.844,83.744
YS: C8.2 R4.1 R8.1 YS.1 | length 48.7
  Top Layer w0.254: R4.1@110.765,86.618 cw(c110.765,84.349) 112.37,85.954 ; R4.1@110.841,86.567 cw(c110.841,84.298) 112.446,85.903 ; R4.1@110.867,86.517 cw(c110.867,84.248) 112.471,85.852 ; R4.1@111.1,86.665 cw(c111.354,86.225) R4.1@111.485,86.716 ; R4.1@111.15,86.589 cw(c111.404,86.149) R4.1@111.536,86.639 ; R4.1@111.227,86.436 cw(c111.481,85.996) R4.1@111.612,86.487 ; R4.1@111.5,86.632 111.717,86.632 ; R4.1@111.535,86.77 ccw(c112.043,86.77) R4.1@111.684,86.411 ; YS.1@115.664,86.075 115.664,85.667 115.011,85.014 ; R4.1@111.2,86.463 cw(c111.2,84.807) 112.371,85.978 ; R4.1@111.2,86.463 cw(c111.2,84.807) 112.371,85.978 ; R4.1@111.2,86.463 cw(c111.2,84.807) 112.371,85.978 ; R4.1@111.2,86.717 cw(c111.2,85.674) 111.937,86.411 ; R4.1@111.2,86.717 cw(c111.2,85.674) 111.937,86.411 ; R4.1@111.2,86.717 cw(c111.2,85.674) 111.937,86.411 ; R4.1@111.306,86.635 ccw(c111.823,86.895) R4.1@111.674,86.336 ; R4.1@111.306,86.635 ccw(c111.823,86.895) R4.1@111.674,86.336 ; R4.1@111.306,86.635 ccw(c111.823,86.895) R4.1@111.674,86.336 ; R4.1@111.554,86.514 cw(c111.717,86.46) 111.717,86.632 ; R4.1@111.554,86.514 cw(c111.717,86.46) 111.717,86.632 ; R4.1@111.554,86.514 cw(c111.717,86.46) 111.717,86.632 ; R4.1@111.554,86.749 ccw(c111.717,86.803) 111.717,86.632 ; R4.1@111.554,86.749 ccw(c111.717,86.803) 111.717,86.632 ; R4.1@111.554,86.749 ccw(c111.717,86.803) 111.717,86.632 ; 111.717,86.632 113.335,85.014 115.011,85.014 ; 115.011,85.014 ccw(c114.297,85.728) YS.1@115.236,86.1 ; 115.011,85.014 ccw(c114.297,85.728) YS.1@115.236,86.1 ; 115.011,85.014 ccw(c114.297,85.728) YS.1@115.236,86.1 ; 115.285,85.287 ccw(c114.689,85.883) YS.1@115.472,86.194 ; 115.285,85.287 ccw(c114.689,85.883) YS.1@115.472,86.194 ; 115.285,85.287 ccw(c114.689,85.883) YS.1@115.472,86.194 ; 115.287,85.664 cw(c115.725,85.714) YS.1@115.594,86.135 ; 115.287,85.664 cw(c115.725,85.714) YS.1@115.594,86.135 ; 115.287,85.664 cw(c115.725,85.714) YS.1@115.594,86.135 ; YS.1@115.483,85.886 cw(c115.43,85.658) 115.664,85.658 ; YS.1@115.483,85.886 cw(c115.43,85.658) 115.664,85.658 ; YS.1@115.483,85.886 cw(c115.43,85.658) 115.664,85.658 ; 115.558,85.561 ccw(c115.08,86.038) YS.1@115.708,86.287 ; 115.558,85.561 ccw(c115.08,86.038) YS.1@115.708,86.287 ; 115.558,85.561 ccw(c115.08,86.038) YS.1@115.708,86.287 ; 115.664,85.658 cw(c116.084,85.658) YS.1@115.802,85.969 ; 115.664,85.658 cw(c116.084,85.658) YS.1@115.802,85.969 ; 115.664,85.658 cw(c116.084,85.658) YS.1@115.802,85.969
  Top Layer w0.5: C8.2@115.323,89.155 cw(c114.5,88.332) 115.664,88.332 ; YS.1@115.402,87.133 ccw(c114.768,87.767) 115.664,87.767 ; YS.1@115.664,86.6 R8.1@115.664,91.44 ; C8.2@115.323,89.509 ccw(c114.5,90.332) 115.664,90.332 ; C8.2@115.323,89.509 ccw(c114.5,90.332) 115.664,90.332 ; C8.2@115.323,89.509 ccw(c114.5,90.332) 115.664,90.332 ; R8.1@115.323,91.055 cw(c114.5,90.232) 115.664,90.232 ; R8.1@115.323,91.055 cw(c114.5,90.232) 115.664,90.232 ; R8.1@115.323,91.055 cw(c114.5,90.232) 115.664,90.232 ; 115.555,89.91 ccw(c115.797,89.77) C8.2@115.64,89.539 ; 115.555,89.91 ccw(c115.797,89.77) C8.2@115.64,89.539 ; 115.555,89.91 ccw(c115.797,89.77) C8.2@115.64,89.539 ; 115.555,90.654 cw(c115.797,90.793) R8.1@115.64,91.025 ; 115.555,90.654 cw(c115.797,90.793) R8.1@115.64,91.025 ; 115.555,90.654 cw(c115.797,90.793) R8.1@115.64,91.025
YS-U: R4.2 U1.29 | length 40
  Top Layer w0.254: U1.29@96.2,81.853 96.2,80.304 v2(96.393,80.112) ; v2(102.794,84.074) 102.921,83.947 110.82,83.947 ; R4.2@111.4,84.932 111.4,84.527 110.82,83.947 ; U1.29@96.113,81.241 cw(c95.903,81.031) 96.2,81.031 ; U1.29@96.113,81.241 cw(c95.903,81.031) 96.2,81.031 ; U1.29@96.113,81.241 cw(c95.903,81.031) 96.2,81.031 ; 96.2,80.478 ccw(c96.76,80.478) v2@96.364,80.083 ; 96.2,80.478 ccw(c96.76,80.478) v2@96.364,80.083 ; 96.2,80.478 ccw(c96.76,80.478) v2@96.364,80.083 ; 96.2,81.031 cw(c96.497,81.031) U1.29@96.287,81.241 ; 96.2,81.031 cw(c96.497,81.031) U1.29@96.287,81.241 ; 96.2,81.031 cw(c96.497,81.031) U1.29@96.287,81.241 ; U1.29@96.2,81.091 ccw(c97.373,81.091) v2@96.544,80.262 ; U1.29@96.2,81.091 ccw(c97.373,81.091) v2@96.544,80.262 ; U1.29@96.2,81.091 ccw(c97.373,81.091) v2@96.544,80.262 ; v2@96.243,80.263 ccw(c95.997,80.511) 96.299,80.685 ; v2@96.243,80.263 ccw(c95.997,80.511) 96.299,80.685 ; v2@96.243,80.263 ccw(c95.997,80.511) 96.299,80.685 ; 96.256,80.882 cw(c96.744,81.013) U1.29@96.307,81.266 ; 96.256,80.882 cw(c96.744,81.013) U1.29@96.307,81.266 ; 96.256,80.882 cw(c96.744,81.013) U1.29@96.307,81.266 ; v2@102.944,84.225 ccw(c103.615,84.895) 103.615,83.947 ; v2@102.944,84.225 ccw(c103.615,84.895) 103.615,83.947 ; v2@102.944,84.225 ccw(c103.615,84.895) 103.615,83.947 ; v2@102.976,83.964 cw(c103.159,83.853) 103.266,84.039 ; v2@102.976,83.964 cw(c103.159,83.853) 103.266,84.039 ; v2@102.976,83.964 cw(c103.159,83.853) 103.266,84.039 ; 110.82,83.947 ccw(c110.414,84.353) R4.2@110.891,84.674 ; 110.82,83.947 ccw(c110.414,84.353) R4.2@110.891,84.674 ; 110.82,83.947 ccw(c110.414,84.353) R4.2@110.891,84.674 ; 111.038,84.165 ccw(c110.675,84.528) R4.2@111.101,84.815 ; 111.038,84.165 ccw(c110.675,84.528) R4.2@111.101,84.815 ; 111.038,84.165 ccw(c110.675,84.528) R4.2@111.101,84.815 ; 111.256,84.383 ccw(c110.936,84.704) R4.2@111.312,84.957 ; 111.256,84.383 ccw(c110.936,84.704) R4.2@111.312,84.957 ; 111.256,84.383 ccw(c110.936,84.704) R4.2@111.312,84.957
  Bottom Layer w0.254: v2(96.393,80.112) 99.568,83.287 102.006,83.287 v2(102.794,84.074) ; 96.757,80.475 ccw(c97.12,80.112) 96.606,80.112 cw(c97.12,80.112) 96.757,80.475 ; 96.757,80.475 cw(c96.393,80.839) 96.393,80.325 ccw(c96.393,80.839) 96.757,80.475 ; 102.43,83.71 ccw(c102.067,84.074) 102.581,84.074 cw(c102.067,84.074) 102.43,83.71 ; 102.43,83.71 cw(c102.794,83.347) 102.794,83.861 ccw(c102.794,83.347) 102.43,83.71
YS_D: U1.4 YS.2 | length 22.6
  Top Layer w0.254: U1.4@99.825,85.478 104.8,85.471 ; U1.4@100.437,85.39 cw(c100.645,85.182) 100.645,85.476 ; U1.4@100.437,85.39 cw(c100.645,85.182) 100.645,85.476 ; U1.4@100.437,85.39 cw(c100.645,85.182) 100.645,85.476 ; U1.4@100.437,85.564 ccw(c100.649,85.776) 100.649,85.476 ; U1.4@100.437,85.564 ccw(c100.649,85.776) 100.649,85.476 ; U1.4@100.437,85.564 ccw(c100.649,85.776) 100.649,85.476 ; 104.717,85.471 ccw(c104.717,85.987) v2@105.082,85.622 ; 104.717,85.471 ccw(c104.717,85.987) v2@105.082,85.622 ; 104.717,85.471 ccw(c104.717,85.987) v2@105.082,85.622 ; 104.719,85.471 cw(c104.719,84.959) v2@105.081,85.321 ; 104.719,85.471 cw(c104.719,84.959) v2@105.081,85.321 ; 104.719,85.471 cw(c104.719,84.959) v2@105.081,85.321
  Bottom Layer w0.254: v2(105.232,85.471) 105.232,86.004 108.018,88.79 109.99,88.79 112.206,86.574 ; v2@105.082,85.622 ccw(c104.718,85.985) 105.232,85.985 ; v2@105.082,85.622 ccw(c104.718,85.985) 105.232,85.985 ; v2@105.082,85.622 ccw(c104.718,85.985) 105.232,85.985 ; 105.232,85.985 ccw(c105.746,85.985) v2@105.383,85.622 ; 105.232,85.985 ccw(c105.746,85.985) v2@105.383,85.622 ; 105.232,85.985 ccw(c105.746,85.985) v2@105.383,85.622
  Bottom Layer w0.6: 112.206,86.574 YS.2@113.996,86.574
ZFKZ: 
pads on no net: U5.3@91.45,96.332 U6.6
copper on no net:
  other v4: 93.269,43.917 93.345,45.314 93.345,46.761 93.345,48.26 93.345,49.708

## Polygon pours and split planes (outlines as drawn)
GND on Top Layer "Top Layer-No Net" (hatched 90Degree grid 0.508 track 0.203, remove dead copper, pour order 4): 142.697,116.444 137.846,116.444 137.846,104.965 137.868,104.943 137.812,104.887 135.179,104.887 134.562,104.887 131.918,102.243 131.902,102.228 131.902,67.473 131.902,67.143 132.512,66.533 132.74,66.305 136.449,66.305 136.449,65.949 137.795,64.603 138.024,64.374 138.024,60.183 137.693,60.183 135.966,58.456 135.636,58.786 132.436,58.786 132.156,58.786 131.826,58.456 131.851,58.431 131.851,57.034 136.246,57.034 137.49,55.789 137.719,55.56 137.719,51.598 137.719,50.226 137.49,49.998 136.931,49.439 136.525,49.439 132.486,49.439 132.232,49.693 131.953,49.414 131.953,48.982 131.953,36.544 131.918,36.509 131.928,36.499 131.928,35.774 132.055,35.774 132.334,35.494 132.563,35.266 132.791,35.266 133.16,35.266 133.193,35.233 150.241,35.233 150.818,35.233 150.978,35.393 151.46,35.875 151.46,35.901 151.46,36.457 151.518,36.514 151.518,65.137 151.518,65.575 152.502,66.559 153.035,67.092 153.111,67.092 173.226,67.092 173.248,67.114 173.321,67.041 173.66,67.041 173.761,67.041 174.371,66.432 174.523,66.279 174.523,65.746 174.523,63.942 174.701,63.765 174.701,63.13 174.752,63.13 175.209,62.672 175.387,62.495 175.844,62.495 176.2,62.495 176.301,62.393 178.664,62.393 179.4,62.393 180.01,63.003 180.418,63.41 180.418,64.43 180.418,102.01 179.039,103.389 177.343,103.389 175.768,104.963 175.681,104.877 174.229,104.877 174.229,104.982 174.168,105.043 174.117,105.094 174.117,116.444 167.208,116.444 167.157,116.495 167.183,116.47 167.183,110.018 167.157,110.018 165.837,108.697 165.684,108.545 145.745,108.545 144.729,108.545 143.942,109.332 142.697,110.577 142.697,112.101 142.697,116.063 143.053,116.419
GND on Bottom Layer "Top Layer-No Net" (solid, remove dead copper, pour order 3): 151.92,113.638 147.069,113.638 147.069,102.159 147.091,102.137 147.035,102.081 144.402,102.081 143.785,102.081 141.141,99.437 141.125,99.422 141.125,64.667 141.125,64.337 141.735,63.727 141.964,63.499 145.672,63.499 145.672,63.143 147.018,61.797 147.247,61.568 147.247,57.377 146.917,57.377 145.189,55.65 144.859,55.98 141.659,55.98 141.379,55.98 141.049,55.65 141.075,55.625 141.075,54.228 145.469,54.228 146.713,52.983 146.942,52.754 146.942,48.792 146.942,47.42 146.713,47.192 146.155,46.633 145.748,46.633 141.71,46.633 141.456,46.887 141.176,46.608 141.176,46.176 141.176,33.738 141.141,33.703 141.151,33.693 141.151,32.968 141.278,32.968 141.557,32.688 141.786,32.46 142.014,32.46 142.384,32.46 142.417,32.427 159.464,32.427 160.041,32.427 160.201,32.587 160.683,33.069 160.683,33.095 160.683,33.651 160.741,33.708 160.741,62.331 160.741,62.769 161.725,63.753 162.258,64.286 162.334,64.286 182.449,64.286 182.471,64.308 182.544,64.235 182.883,64.235 182.985,64.235 183.594,63.626 183.747,63.473 183.747,62.94 183.747,61.136 183.924,60.959 183.924,60.324 183.975,60.324 184.432,59.866 184.61,59.689 185.067,59.689 185.423,59.689 185.525,59.587 187.887,59.587 188.623,59.587 189.233,60.197 189.641,60.605 189.641,61.624 189.641,99.204 188.262,100.583 186.566,100.583 184.991,102.157 184.905,102.071 183.452,102.071 183.452,102.176 183.391,102.237 183.34,102.288 183.34,113.638 176.431,113.638 176.381,113.689 176.406,113.664 176.406,107.212 176.381,107.212 175.06,105.891 174.907,105.739 154.968,105.739 153.952,105.739 153.165,106.526 151.92,107.771 151.92,109.295 151.92,113.257 152.276,113.613

## Keep-outs
Keep-Out Layer:
  circle w0.1: c82.557,57.679 r1.45
  circle w0.1: c119.262,119.579 r1.45
  circle w0.1: c89.13,119.579 r1.45
  circle w0.1: c125.775,60.079 r1.5
  lines w0.1: 80,58.793 80,78.216 cw(c80.562,78.216) 80.562,78.778 ; 80,59.154 80,31.494 ccw(c81.276,31.494) 81.276,30.218 98.326,30.218 ccw(c98.318,31.5) 99.6,31.5 99.6,60.123 cw(c101.577,60.123) 101.577,62.1 121.53,62.1 cw(c121.53,60.884) 122.746,60.884 122.746,59.436 ccw(c124.8,59.436) 124.8,57.382 ; 80,81.955 80,97.229 85.95,99.929 86,99.979 86,119.634 cw(c88.245,119.634) 88.245,121.879 ; 80.01,81.955 ccw(c80.626,81.955) 80.626,81.339 ; 80.562,78.779 83,78.779 ; 80.626,81.339 83,81.339 ; 83,78.809 83,81.309 ; 88.195,121.879 91.659,121.879 92.939,120.599 99.289,120.599 100.571,121.882 ; 94.25,66.232 86.1,66.232 86.1,67.462 94.25,67.462 ; 94.3,66.232 94.3,67.462 ; 100.571,121.879 107.458,121.879 108.737,120.599 111.76,120.599 113.04,121.879 120.141,121.879 ; 119.941,121.879 cw(c119.941,119.57) 122.25,119.57 122.25,100.029 122.311,99.862 128.5,96.996 128.5,81.869 ; 124.8,57.382 126.467,57.382 ccw(c126.467,59.415) 128.5,59.415 128.5,78.096 ; 125.48,78.809 125.48,81.309 ; 125.495,78.779 127.787,78.779 ; 125.495,81.339 127.94,81.339 ccw(c127.94,81.899) 128.5,81.899 ; 127.787,78.779 cw(c127.787,78.066) 128.5,78.066 ; 87.757,113.673 91.825,113.673 91.825,115.333 87.757,115.333 87.757,113.673 ; 93.345,105.943 93.345,117.424 93.955,118.034 107.772,118.034 108.356,117.45 108.356,106.07 107.772,105.486 93.802,105.486 93.345,105.943 ; 109.728,113.673 118.085,113.673 118.085,115.333 109.728,115.333 109.728,113.673
  lines w0.15: 90.297,64.581 90.297,65.811 ; 119.395,66.269 119.395,65.16 121.726,65.16

## Other copper
Top Layer:
  rectangle net GND: 87.237,38.608 89.306,40.538
  rectangle net GND: 86.563,36.373 88.951,38.622
  rectangle net BT: 114.122,63.83 116.992,65.608
  rectangle net NetC4_1: 100.635,75.082 103.149,76.632
  rectangle net NetC4_1: 100.482,76.352 103.022,79.35
  rectangle net BT: 106.985,76.759 121.641,78.765
  rectangle net GND: 118.262,80.01 123.977,82.88
  rectangle net GND: 106.248,80.493 118.415,82.525
  rectangle net BT: 113.817,72.542 117.983,77.14
  rectangle net BT: 115.087,65.938 118.059,73.203
  rectangle net BT: 121.488,76.759 122.453,78.867
  rectangle net 8.4V: 120.345,73.406 122.174,75.514
  rectangle net 8.4V: 120.396,67.131 122.422,75.108
  rectangle net NetC4_2: 102.108,64.516 103.759,74.143
  rectangle net NetC4_2: 103.53,64.491 105.181,69.825
  rectangle net NetC4_2: 105.08,68.047 105.943,69.596
  rectangle net NetC4_1: 101.194,78.994 102.946,81.534
  rectangle net NetC4_1: 100.178,64.872 101.194,80.264
  rectangle net NetC4_1: 99.314,64.694 100.635,69.139
  rectangle net NetC4_1: 98.933,74.524 99.715,78.689
  rectangle net NetC4_1: 98.4,67.054 100.046,70.714
  rectangle net GND: 86.868,62.56 88.265,65.354
Bottom Layer:
  rectangle net GND: 94.158,43.129 95.098,51.13
  rectangle net GND: 91.669,50.546 95.301,62.967
  rectangle net GND: 87.325,41.91 92.481,62.992
  rectangle net GND: 87.173,36.322 94.59,43.104
  rectangle net GND: 89.023,37.059 91.08,40.437
  rectangle net GND: 86.106,63.373 89.179,64.643
  rectangle net GND: 106.07,100.432 107.798,102.464
  rectangle net BT: 106.832,77.013 121.742,78.842
  rectangle net GND: 105.639,80.315 121.488,82.499
  rectangle net GND: 104.572,79.223 106.172,81.432
  rectangle net BT: 114.833,73.914 117.704,77.572
  rectangle net 8.4V: 120.32,73.406 122.606,75.717
  rectangle net 8.4V: 119.583,67.029 122.301,74.447
  rectangle net BT: 115.087,68.758 117.907,72.822
  rectangle net GND: 85.788,39.751 89.484,41.453
  rectangle net NetC4_2: 102.21,65.43 106.299,69.393
  rectangle net NetC4_2: 102.159,68.123 103.683,71.399
  rectangle net NetC4_1: 100.279,65.38 101.143,70.51
  rectangle net NetC4_1: 98.679,66.497 100.99,68.834
  rectangle net NetC4_1: 98.273,67.513 98.781,68.428
  rectangle net GND: 85.141,43.917 88.138,54.051
  rectangle net NetC4_1: 100.99,79.654 102.514,81.178
  rectangle net 8.4V: 121.793,66.497 121.818,66.548
  rectangle net 8.4V: 120.675,66.396 121.818,67.488
  rectangle net BT: 115.214,66.319 117.983,69.266
  rectangle net BT: 115.976,65.151 118.059,66.802
  rectangle net GND: 110.109,64.338 112.624,72.187
  rectangle net GND: 109.118,64.338 112.624,66.116

## Silkscreen, mask and mechanical layers (free items; w line width, h text height)
Top Overlay:
  circle w0.18: c84.556,47.346 r3.15
  circle w0.16: c125.175,84.532 r2.5
  lines w0.16: 105.156,63.144 105.17,63.158 ; 103.759,92.227 103.759,93.726 106.375,93.726 106.375,92.227 103.759,92.227 ; 109.271,96.723 111.785,96.723 111.785,98.247 109.271,98.247 109.271,96.723 ; 110.236,108.534 110.236,111.074 111.658,111.074 111.658,108.534 110.236,108.534 ; 115.164,98.222 115.164,99.771 117.627,99.771 117.627,98.222 115.164,98.222
  lines w0.2: 85.065,84.633 85.065,85.522 ; 85.065,86.614 85.065,87.503 ; 94.894,102.006 94.894,105.08 ; 94.894,118.389 94.894,120.142 ; 107.29,101.776 107.29,105.029
  lines w0.22: 94.78,30.582 99.35,30.582 ; 117.096,63.629 120.5,63.629 ; 117.125,63.598 117.125,68.729 ; 117.125,68.727 111.121,68.727 111.121,76.116 123.999,76.116 ; 120.5,63.598 120.5,68.729 ; 120.525,68.729 123.973,68.727 123.973,76.116 ; 122.475,81.748 127.825,81.748 ; 122.475,81.823 122.475,85.95 123.778,87.253 ; 123.825,87.273 127.85,87.273 127.85,81.773 ; 127.85,81.779 127.875,81.804 ; 81.198,45.904 81.198,50.635 87.924,50.635 87.917,44.035 83.067,44.035 81.198,45.904
  text "G-" at 97.739,118.745 h1.3
  text "-R" at 108.331,118.72 h1.3
  text "BC2" at 88.671,116.611 h0.9
  text "GND" at 119.482,113.335 h1 r90
  text "BC1" at 93.04,112.268 h1 r90
  text "HWPOW" at 109.576,112.116 h0.9 r90
  text "OUT" at 87.401,112.09 h1 r90
  text "3.3" at 119.913,98.12 h0.9
  text "CE" at 99.67,96.698 h0.9 r90
  text "GND" at 83.456,96.512 h1 r24
  text "IRQ" at 106.045,95.936 h0.9 r90
  text "GND" at 98.374,95.809 h0.9 r90
  text "3V3" at 97.079,95.783 h0.9 r90
  text "SCK" at 102.184,95.733 h0.9 r90
  text "CSN" at 100.889,95.656 h0.9 r90
  text "MOSI" at 103.429,95.148 h0.9 r90
  text "MISO" at 104.699,95.047 h0.9 r90
  text "16" at 91.415,90.272 h0.7
  text "RST" at 119.177,86.411 h0.8
  text "+" at 120.193,83.947 h1.8
  text "1" at 101.067,82.22 h0.8
  text "+" at 122.911,77.241 h2.5
  text "Y>" at 93.04,73.609 h1 r90
  text "3.3V" at 86.944,73.584 h1 r90
  text "GN" at 97.079,73.584 h1 r90
  text "AM" at 90.983,73.558 h1 r90
  text "Y30" at 89.078,73.533 h1 r90
  text "<Z" at 94.996,73.457 h1 r90
  text "SWIM" at 86.309,69.367 h0.8
  text "RST" at 91.796,69.291 h0.8
  text "TEMP" at 124.79,69.012 h0.8
  text "+" at 94.742,64.541 h2
  text "5V" at 89.383,62.306 h1.2
  text "+" at 98.603,61.544 h2
  text "GND" at 87.706,61.417 h1 r90
  text "+" at 80.594,43.459 h2
  text "+" at 99.314,35.077 h1.5 r90
Bottom Overlay:
  lines w0.16: 95.021,101.776 95.021,105.181 ; 96.19,95.301 96.19,93.32 96.317,93.193 105.029,93.193 105.105,93.269 105.105,95.199 ; 97.46,95.199 97.46,93.751 97.485,93.726 106.553,93.726 106.655,93.828 106.655,95.352 ; 98.6,70.028 98.6,63.119 104.369,63.119 104.369,69.875 104.521,70.028 98.628,70.028 ; 106.756,101.879 106.756,105.054
  lines w0.25: 96.063,101.956 96.063,105.029 ; 108.001,101.802 108.001,105.054
  text "-G" at 99.898,118.643 h1.2
  text "R-" at 110.211,118.567 h1.2
  text "HWPOW" at 109.576,116.713 h1 r90
  text "38BC2" at 91.999,116.662 h1
  text "GND" at 119.609,115.976 h1 r90
  text "38BC1" at 92.939,113.436 h1 r90
  text "38OUT" at 87.638,113.386 h1 r90
  text "FL" at 114.427,110.414 h1.2
  text "IRQ" at 97.917,98.171 h0.9 r90
  text "CE" at 104.394,98.146 h0.9 r90
  text "SCK" at 101.752,98.12 h0.9 r90
  text "CSN" at 103.022,98.12 h0.9 r90
  text "GND" at 106.985,98.095 h0.9 r90
  text "GND" at 96.622,98.069 h0.9 r90
  text "3V3" at 105.664,98.069 h0.9 r90
  text "MISO" at 99.187,98.044 h0.9 r90
  text "MOSI" at 100.355,98.044 h0.9 r90
  text "3.3" at 124.067,95.958 h1
  text "GND" at 82.321,93.853 h1 r90
  text "SWIM" at 125.171,93.447 h1
  text "GND" at 124.333,90.83 h1
  text "YS" at 116.18,88.494 h1.5
  text "RST" at 124.282,88.417 h1
  text "BT" at 121.056,84.557 h1.5 r90
  text "+" at 123.215,77.521 h2
  text "BT" at 116.967,73.304 h1.2 r90
  text "8.4V" at 121.133,73.254 h1 r90
  text "MO" at 102.692,70.815 h1.5
  text "GND" at 125.552,66.446 h1 r270
  text "20190812HFCC" at 80.772,64.922 h1 r270
  text "GND" at 86.487,63.906 h1.15 r180
  text "5V" at 94.844,62.636 h1.2
  text "+" at 92.405,62.154 h2.2
  text "B1" at 93.396,34.95 h1.2
  text "BH" at 88.57,34.874 h1.2
  text "TY" at 98.577,34.849 h1.2
  text "B2" at 83.464,34.747 h1.2
Top Solder:
  lines w0.7: 100.355,72.72 100.355,75.997 101.041,76.683 103.048,76.683
  lines w1: 102.26,75.616 102.26,76.505 ; 102.286,72.949 102.286,73.889 ; 116.482,66.246 116.482,68.732